# Altium PCB PCB1.PcbDoc
Units mm, origin at the board's own origin, x right, y up, seen from the top; angles counter-clockwise.
Board outline 37.35 x 18.93 mm, 2 copper layers (Top Layer, Bottom Layer); 29 components, 24 nets, 130 pads, 27 vias.
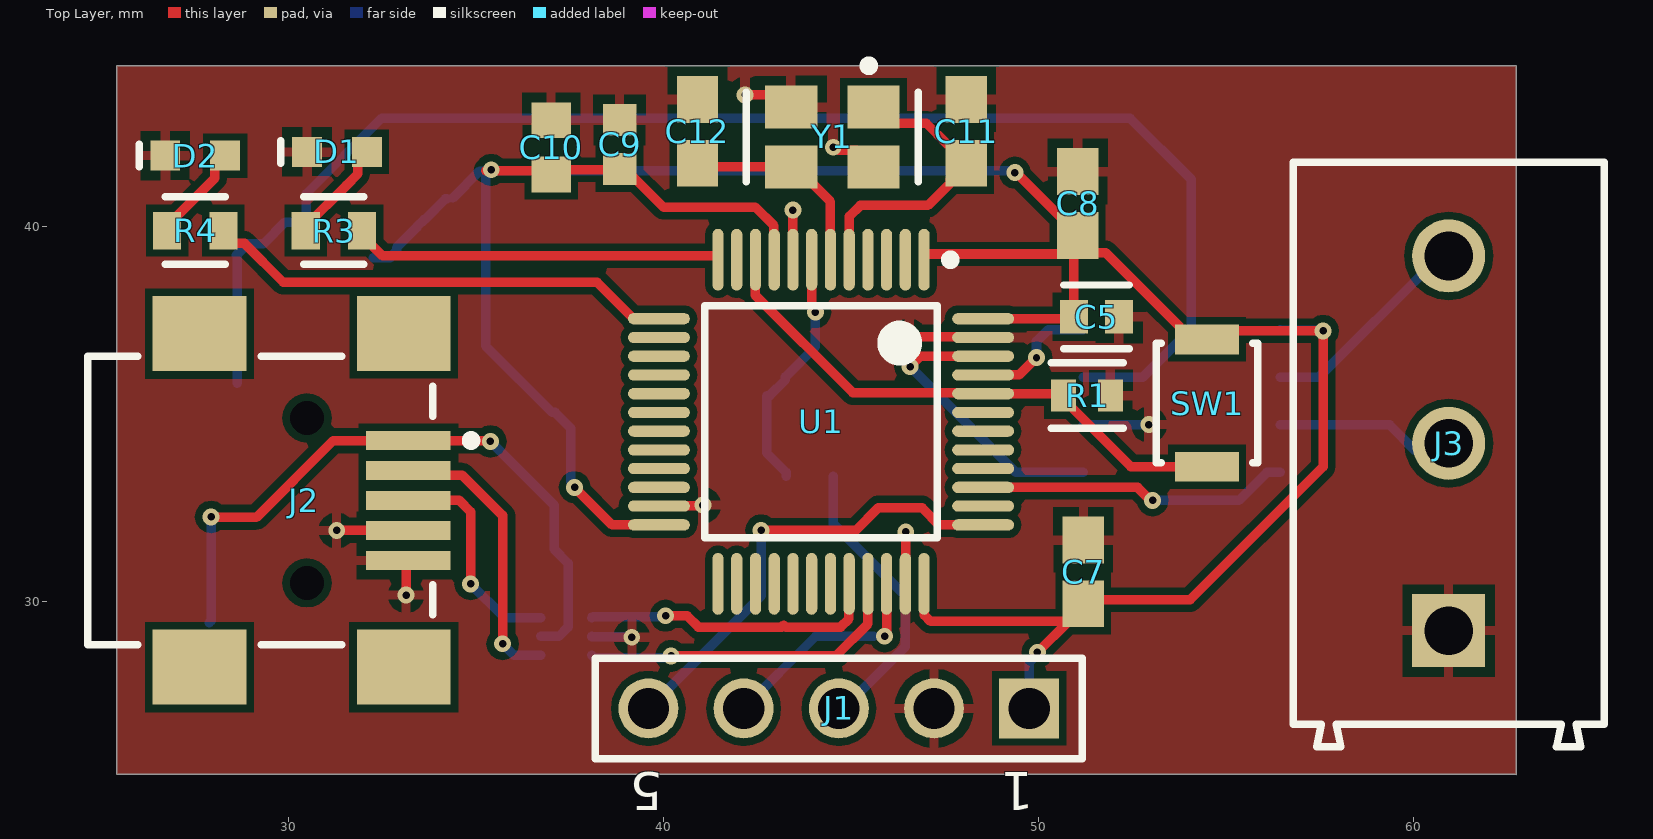
[diagram p0: Top Layer view]
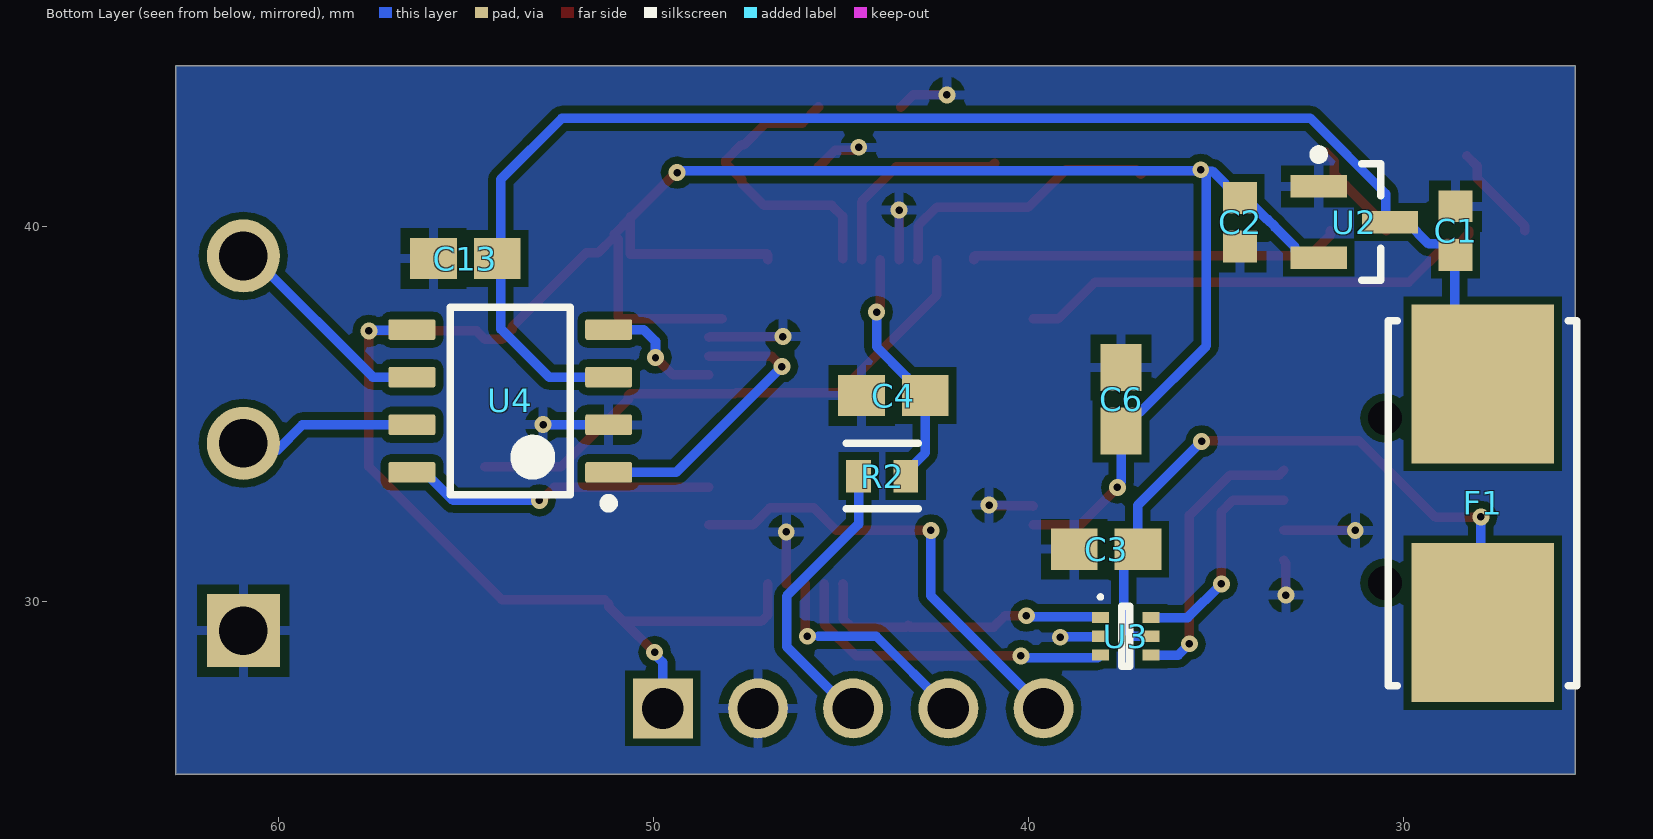
[diagram p1: Bottom Layer view, seen from below]
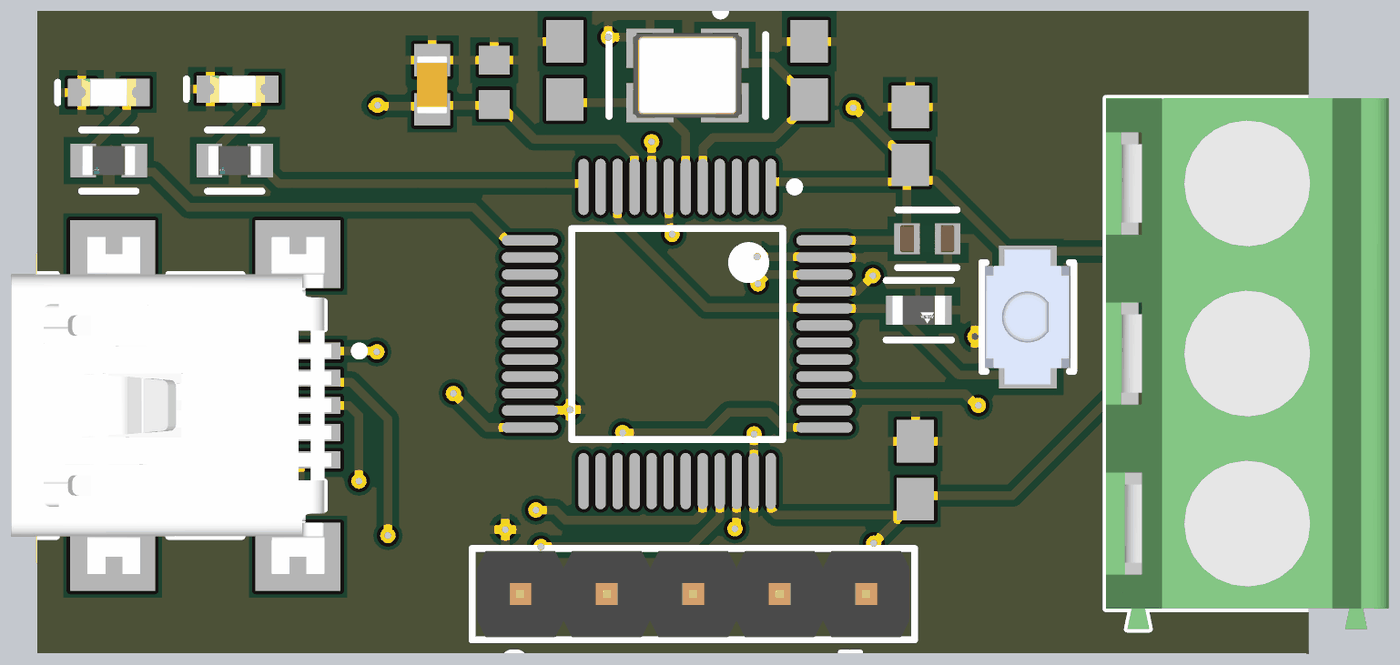
[diagram p2: 3D render of the assembled board from above, using the file's embedded part models]

## Layer stack, top to bottom
Top Solder: solder mask 0.0102, Solder Resist, Dk 3.5
Top Layer: signal copper 0.0356
Dielectric 1: dielectric 0.32, FR-4, Dk 4.8
Bottom Layer: signal copper 0.0356
Bottom Solder: solder mask 0.0102, Solder Resist, Dk 3.5

## Board outline
25.4,25.4 25.4,44.3 62.75,44.3 62.75,25.375 ccw(c62.725,25.375) 62.725,25.4

## Design rules (kind name [scope] priority, off if disabled: settings)
Clearance [All] p1: gap=0.2 ignorepadtopadclearanceinfootprint=FALSE
ComponentClearance [All] p1: gap=0.1 collisioncheckmode=3 verticalgap=0.1 showdistances=FALSE
PolygonConnect [All] p1: connectstyle=Relief reliefconductorwidth=0.254 reliefentries=4 polygonreliefangle="90 Angle" airgapwidth=0.254
RoutingVias [All] p1: holewidth=0.2 width=0.45 viastyle="Through Hole" minholewidth=0.2 minwidth=0.45 maxholewidth=0.2 maxwidth=0.45
SilkToSilkClearance [All] p1: silktosilkclearance=0.1
SolderMaskExpansion [All] p1: expansion=0.102 istentingtop=FALSE
Width [All] p1: maxlimit=0.254 minlimit=0.254 preferedwidth=0.254
28 further rules are at their usual default settings.

## Components (designator, comment, footprint, x,y, rotation, side; value= is the part's Value field where it differs from the comment)
C1 "1uF" CAPC1608X90X35LL15T15 28.6,39.9 r90 bottom
C2 "1uF" CAPC1608X90X35LL15T15 34.35,40.125 r270 bottom
C3 "100nF" CAPC1608X90X35ML15T15 37.925,31.4 r180 bottom
C4 "100nF" CAPC1608X90X35ML15T15 43.6,35.5 r0 bottom
C5 "4.7uF" FP-C0603-CG-MFG 51.55,37.6 r0 top
C6 "100nF" CAPC1608X90X35ML15T15 37.525,35.4 r90 bottom
C7 "100nF" CAPC1608X90X35ML15T15 51.2,30.795 r90 top
C8 "100nF" CAPC1608X90X35ML15T15 51.051,40.625 r90 top
C9 "1uF" CAPC1608X90X35LL15T15 38.825,42.2 r90 top
C10 "10nF" CAPC1608X90X35ML10T15 37,42.125 r90 top
C11 "10pF" CAPC1608X90X35ML15T15 48.075,42.55 r90 top
C12 "10pF" CAPC1608X90X35ML15T15 40.9,42.55 r90 top
C13 "100nF" CAPC1608X90X35ML15T15 55.025,39.156 r0 bottom
D1 "STATUS" 0603_A 31.283,42 r0 top
D2 "CAN1" 0603_A 27.5,41.9 r0 top
F1 "500mA" FP-0154-MFG 27.875,32.625 r270 bottom
J1 "SWD" 5PIN_HEADER 44.675,27.15 r180 top
J2 "10033526-N3212LF" FCI-10033526-N3212LF_V 30.4,32.7 r270 top
J3 "3PIN-Screw-Terminal" 3PIN-Screw-Terminal 60.95,34.225 r90 top
R1 "10K" FP-MCT0603-IPC_C 51.3,35.5 r0 top
R2 "10K" FP-MCT0603-IPC_C 43.9,33.35 r180 bottom
R3 "820R" FP-CRCW0603-e3-MFG 31.2,39.9 r180 top
R4 "330R" FP-CRCW0603-e3-MFG 27.5,39.9 r180 top
SW1 "B3U-1000P" FP-B3U-1000P-MFG 54.5,35.3 r270 top
U1 "STM32F302C8T6" STM-LQFP48_M 44.2,34.8 r270 top
U2 "MCP1700T-3302E/TT" SOT-23-TT3_N 31.3,40.13 r180 bottom
U3 "NUF2042XV6T1" ONSC-SOT-563-6-463A-01_V 37.4,29.075 r180 bottom
U4 "SN65HVD256DR" D0008A_L 53.825,35.355 r0 bottom
Y1 "TSX-3225 16.0000MF18X-AC0" FP-TSX-3225-MFG 44.5,42.4 r180 top

## Footprints (in the part's own frame and the unit in brackets; to place one, negate y for a bottom-side part, rotate by r counter-clockwise, add the part's x,y. Pads: shape width x height; smd on the part's side, far side on the other; paste and mask are expansions set on the pad)
3PIN-Screw-Terminal [mm] "5,00mm - modular - green - Horizontal entry with rising cage clamp -  10,0mm height - 03p"
  rect 1.95x1.95 hole 1.3: 1(-5,0)
  round 1.95 hole 1.3: 2(0,0) 3(5,0)
  silkscreen extent -8.1,-4.15 7.5,4.15, body extent -8.1,-4.15 7.5,4.15, height 10.05
5PIN_HEADER [mm] "Pin Header, pitch 2.54 mm, THT, Vertical, single row, 5p"
  rect 1.6x1.6 hole 1.1: 1(-5.08,0)
  round 1.6 hole 1.1: 2(-2.54,0) 3(0,0) 4(2.54,0) 5(5.08,0)
  silkscreen extent -6.5,-1.35 6.5,1.35, body extent -6.35,-1.27 6.35,1.27, height 8.57
0603_A [mm] "Chip LED, 2-Leads, Body 1.6x0.8mm, IPC Medium Density"
  rect 0.8x0.8 smd: 1(-0.8,0) 2(0.8,0)
  silkscreen extent -1.5,-0.3 -1.5,0.3, body extent -0.8,-0.4 0.8,0.4, height 0.7
CAPC1608X90X35LL15T15 [mm] "Chip Capacitor, 2-Leads, Body 1.60x0.81mm, IPC High Density"
  rect 0.85x0.9 smd: 1(-0.65,0) 2(0.65,0)
  body extent -0.88,-0.48 0.87,0.48, height 0.9
CAPC1608X90X35ML10T15 [mm] "Chip Capacitor, 2-Leads, Body 1.7x0.9mm, IPC Low Density"
  rect 0.95x1.05 smd: 1(-0.725,0) 2(0.725,0)
  body extent -0.85,-0.45 0.85,0.45, height 0.9
CAPC1608X90X35ML15T15 [mm] "Chip Capacitor, 2-Leads, Body 1.60x0.81mm, IPC Low Density"
  rect 1.25x1.1 smd: 1(-0.85,0) 2(0.85,0)
  body extent -0.88,-0.48 0.87,0.48, height 0.9
D0008A_L [mm] "SOIC, 8-Leads, Body 5x4mm, Pitch 1.27mm, IPC High Density"
  rrect18% 1.25x0.55 smd: 1(-2.625,1.905) 2(-2.625,0.635) 3(-2.625,-0.635) 4(-2.625,-1.905) 5(2.625,-1.905) 6(2.625,-0.635) 7(2.625,0.635) 8(2.625,1.905)
  silkscreen extent -2.75,-2.5 1.6,2.85, body extent -3,-2.45 3,2.45, height 1.63
FCI-10033526-N3212LF_V [mm] "SMD, 5-Leads, Body 9.2x7.7mm, Pitch 0.8mm"
  rect 0.5x2.25 smd: 1(-1.6,2.788) 2(-0.8,2.788) 3(0,2.788) 4(0.8,2.788) 5(1.6,2.788)
  rect 2x2.5 smd: 6(-4.45,2.663) 7(4.45,2.663) 8(-4.45,-2.787) 9(4.45,-2.787)
  round 0 hole 0.9 unplated: MH1(-2.2,0.083) MH2(2.2,0.083)
  silkscreen extent -3.85,-5.77 3.85,4.59, body extent -4.95,-5.77 4.95,3.63, height 4.02
FP-0154-MFG [mm]
  rect 4.24x3.81 smd paste+0 mask+0: 1(-3.185,0) 2(3.185,0)
  silkscreen extent -4.86,-2.51 4.86,2.51, body extent -4.86,-2.51 4.87,2.51, height 3.81
FP-B3U-1000P-MFG [mm]
  rect 0.8x1.7 smd paste+0 mask+0: 1(-1.7,0) 2(1.7,0)
  silkscreen extent -1.6,-1.35 1.6,1.35, body extent -2.2,-1.45 2.2,1.45, height 0.25
FP-C0603-CG-MFG [mm]
  rect 0.75x0.9 smd paste+0 mask+0: 1(-0.6,0) 2(0.6,0)
  silkscreen extent -0.87,-0.85 0.87,0.85, body extent -0.8,-0.4 0.8,0.4, height 0.9
FP-CRCW0603-e3-MFG [mm]
  rect 0.75x1 smd paste+0 mask+0: 1(-0.75,0) 2(0.75,0)
  silkscreen extent -0.8,-0.9 0.8,0.9, body extent -1.22,-0.6 1.22,0.6, height 0.25
FP-MCT0603-IPC_C [mm]
  rect 0.664x0.862 smd paste+0 mask+0: 1(-0.629,0) 2(0.629,0)
  silkscreen extent -0.96,-0.87 0.96,0.87, body extent -1.06,-0.58 1.06,0.58, height 0.25
FP-TSX-3225-MFG [mm]
  rect 1.4x1.15 smd paste+0 mask+0: 1(-1.1,-0.8) 2(1.1,-0.8) 3(1.1,0.8) 4(-1.1,0.8)
  silkscreen extent -2.3,-2.02 2.3,1.2, body extent -1.9,-1.48 1.9,1.48, height 0.25
ONSC-SOT-563-6-463A-01_V [mm] "SOT23, 6-Leads, Body 1.6x1.2mm, Pitch 0.5mm"
  rect 0.45x0.3 smd: 1(-0.675,0.5) 2(-0.675,0) 3(-0.675,-0.5) 4(0.675,-0.5) 5(0.675,0) 6(0.675,0.5)
  silkscreen extent -0.72,-0.8 0.1,1.1, body extent -0.6,-0.8 0.6,0.8, height 0.6
SOT-23-TT3_N [mm] "SOT23, 3-Leads, Body 2.9x1.3mm, Pitch 0.95mm, Lead Span 2.4mm, IPC Medium Density"
  rect 1.5x0.6 smd: 1(-0.95,0.95) 2(-0.95,-0.95) 3(0.95,0)
  silkscreen extent -1.07,-1.55 0.7,1.92, body extent -0.7,-1.52 0.7,1.53, height 1.12
STM-LQFP48_M [mm] "QFP, 48-Leads, Body 7x7mm, Pitch 0.5mm, IPC Low Density"
  oval 1.65x0.3 smd: 1(-4.325,2.75) 2(-4.325,2.25) 3(-4.325,1.75) 4(-4.325,1.25) 5(-4.325,0.75) 6(-4.325,0.25) 7(-4.325,-0.25) 8(-4.325,-0.75) 9(-4.325,-1.25) 10(-4.325,-1.75) 11(-4.325,-2.25) 12(-4.325,-2.75) 25(4.325,-2.75) 26(4.325,-2.25) 27(4.325,-1.75) 28(4.325,-1.25) 29(4.325,-0.75) 30(4.325,-0.25) 31(4.325,0.25) 32(4.325,0.75) 33(4.325,1.25) 34(4.325,1.75) 35(4.325,2.25) 36(4.325,2.75)
  oval 0.3x1.65 smd: 13(-2.75,-4.325) 14(-2.25,-4.325) 15(-1.75,-4.325) 16(-1.25,-4.325) 17(-0.75,-4.325) 18(-0.25,-4.325) 19(0.25,-4.325) 20(0.75,-4.325) 21(1.25,-4.325) 22(1.75,-4.325) 23(2.25,-4.325) 24(2.75,-4.325) 37(2.75,4.325) 38(2.25,4.325) 39(1.75,4.325) 40(1.25,4.325) 41(0.75,4.325) 42(0.25,4.325) 43(-0.25,4.325) 44(-0.75,4.325) 45(-1.25,4.325) 46(-1.75,4.325) 47(-2.25,4.325) 48(-2.75,4.325)
  silkscreen extent -4.45,-3.1 3.1,3.58, body extent -3.5,-3.5 3.5,3.5, height 1.6

## Part data
C1 C2 C9: library part CMP-2006-02298-2, Manufacturer=Kemet, Part Number=C0603C105K4RACTU
C3 C4 C6 C7 C8 C13: library part CMP-2006-04496-1, Manufacturer="AVX Interconnect / Elco", Part Number=0603YC104KAZ2A
C5: library part CMP-2006-02256-2, "CAP CER 4.7UF 6.3V X5R 0603", Manufacturer=Kemet, Manufacturer Part Number=C0603C475K9PACTU, Package=C0603-CG, Temperature="-55°C to +85°C", Temperature Characteristic=X5R, Temperature Coefficient=15%, Temperature Range High=+85°C, Temperature Range Low=-55°C, Tolerance=10%, Voltage Rating=6.3V, Automotive=No, Capacitance=4.7uF, Category=Cap, ComponentLink2Description=Datasheet, ComponentLink2URL=https://content.kemet.com/datasheets/KEM_C1006_X5R_SMD.pdf, Device Class L1="Passive Components", Device Class L2=Capacitors, Device Class L3="Ceramic Capacitors", Digikey Description="CAP CER 4.7UF 6.3V X5R 0603", Height=0.9mm, Lead Free=Yes, Material=Ceramic, Mouser Description="Multilayer Ceramic Capacitors MLCC - SMD/SMT 6.3volts 4.7uF X5R 10%", Octopart=https://octopart.com/c0603c475k9pactu-kemet-104242, RoHS=TRUE, Ipc Land Pattern Name=CAPC16080X80
C10: library part CMP-2100-03642-1, "Chip Capacitor, 10 nF, +/- 10%, 50 V, -55 to 125 degC, 0603 (1608 Metric), RoHS, Tape and Reel", Case Code (Metric)=1608, Case Code (Imperial)=0603, Dielectric=X7R, Dielectric Material=Ceramic, Manufacturer=Murata, Max Operating Temperature=125degC, Min Operating Temperature=-55degC, Package Description="2-Pin Surface Mount Device, Body 1.6 x 0.8 mm", Package Quantity=1, Tolerance=10%, Voltage=50V, Insulation Resistance=10GR, Capacitance=10nF, Case/Package=0603, Datasheet URL=http://search.murata.co.jp/Ceramy/image/img/A01X/G101/ENG/GRM188R71H103KA01-01.pdf, Datasheet Version=42401.0, Depth=0.8mm, Height=0.8mm, Lead Free=LeadFree, Length=1.6mm, Manufacturer URL=http://www.murata.com/, Material=Ceramic, Mount=SurfaceMount, Number of Pins=2, Package Reference=0603, Packaging=TapeandReel, REACH SVHC=Unknown, RoHSCompliant=True, Termination=SMD/SMT, Thickness=0.035inch, Voltage Rating=50V, Voltage Rating (DC)=50V, Width=0.031inch
C11 C12: library part CMP-2006-02082-1, Manufacturer="AVX Interconnect / Elco", Part Number=06035C100KAT2A
D1: library part CMP-1426-00001-1, "SMD mono-color Chip LED, WL-SMCW, Red", Color=Red, Manufacturer="Wuerth Elektronik", PartNumber=150060RS75000, ComponentLink1Description="Manufacturer URL", ComponentLink1URL=http://www.we-online.com, ComponentLink2Description=Datasheet, ComponentLink2URL=http://katalog.we-online.com/led/datasheet/150060RS75000.pdf, PackageReference=0603_A
D2: library part CMP-1426-00002-1, "SMD mono-color Chip LED, WL-SMCW, Green", Color=Green, Manufacturer="Wuerth Elektronik", PartNumber=150060GS75000, ComponentLink1Description="Manufacturer URL", ComponentLink1URL=http://www.we-online.com, ComponentLink2Description=Datasheet, ComponentLink2URL=http://katalog.we-online.com/led/datasheet/150060GS75000.pdf, PackageReference=0603_A
F1: library part CMP-08605-000021-1, "FUSE BOARD MNT 500MA 125VAC/VDC", Fuse Current=0.5A, Manufacturer=Littelfuse, Manufacturer Part Number=0154.500DRT, Max Fuse Ac Voltage=125V, Package=0154, Temperature="-55°C to +125°C", Temperature Range High=+125°C, Temperature Range Low=-55°C, Automotive=No, Category=Fuse, ComponentLink2Description=Datasheet, ComponentLink2URL=https://www.littelfuse.com/~/media/electronics/datasheets/fuses/littelfuse_fuse_154_154t_154l_154tl_datasheet.pdf.pdf, Device Class L1="Circuit Protection", Device Class L2=Fuses, Device Class L3=unset, Digikey Description="FUSE BOARD MNT 500MA 125VAC/VDC", Fuse Blow Speed=Slow, Fuse I2T=0.24A2Sec, Height=3.81mm, Lead Free=Yes, Max Fuse Dc Voltage=125V, Mouser Description="Surface Mount Fuses Fuseblck w/ fuse .5A OMNI BLOK 154T", Octopart=https://octopart.com/0154.500drt-littelfuse-565915, RoHS=TRUE
J1: library part 5PIN_HEADER
J2: library part CMP-1698-00001-3, "Mini USB B-Type, 5-Pin SMD, RoHS, Tape and Reel", Package Quantity=1, ComponentLink1Description="Manufacturer URL", ComponentLink1URL=http://portal.fciconnect.com/, ComponentLink2Description=Datasheet, ComponentLink2URL=http://portal.fciconnect.com/Comergent//fci/drawing/10033526.pdf, DatasheetVersion="Rev. N", Height="4 mm", Length="9.9 mm", Mount="Surface Mount", Mounting Technology="Surface Mount", PackageDescription="5-Pin Surface Mount Device, Body 9.2 x 7.7 mm, Pitch 0.8 mm", Packaging="Tape and Reel", PartNumber=10033526-N3212LF, Pins=5, RoHSCompliant=True
R1 R2: library part CMP-02407-000418-1, "RES SMD 100 OHM 1% 1/8W 0603", Case Code (Metric)=1608, Case Code (Imperial)=0603, Max Operating Temperature=125°C, Max Power Dissipation=125mW, Min Operating Temperature=-55°C, Package Quantity=1, Power Rating=100mW, Resistance=10kR, Temperature Coefficient=50ppm/°C, Tolerance=1%, Voltage Rating=75V, Case/Package=0603, Composition="Thin Film", Contact Plating=Tin, Depth=0.85mm, Height=0.022inch, Lead Free="Lead Free", Length=1.55mm, Military Standard=Not, Mount="Surface Mount", Number of Terminations=2, Packaging="Tape and Reel", Radiation Hardening=No, Voltage Rating (DC)=75V, Width=0.8mm
R3: library part CMP-2000-03596-2, "RES Thick Film, 820kΩ, 1%, 0.1W, 100ppm/°C, 0603", Case Code (Metric)=1608, Case Code (Imperial)=0603, Max Operating Temperature=155°C, Max Power Dissipation=100mW, Min Operating Temperature=-55°C, Package Quantity=10, Resistance=820kR, Temperature Coefficient=100ppm/°C, Tolerance=1%, Voltage Rating=75V, Case/Package=0603, Composition="Thick Film", Contact Plating=Tin, Depth=0.85mm, Features="Automotive AEC-Q200", Height=0.45mm, Lead Free="Lead Free", Length=1.55mm, Military Standard=Not, Number of Pins=2, Number of Terminations=2, Packaging="Tape and Reel", Power Rating=100mW, Radiation Hardening=No, Termination=SMD/SMT, Voltage Rating (DC)=75V, Weight=7.1E-05oz, Width=0.033inch
R4: library part CMP-1012-00454-3, "RES Thick Film, 330Ω, 1%, 0.1W, 100ppm/°C, 0603", Case Code (Metric)=1608, Case Code (Imperial)=0603, Max Operating Temperature=155°C, Max Power Dissipation=100mW, Min Operating Temperature=-55°C, Package Quantity=10, Temperature Coefficient=100ppm/°C, Tolerance=1%, Voltage Rating=75V, Case/Package=0603, Composition="Thick Film", Contact Plating=Tin, Depth=0.85mm, Features="Automotive AEC-Q200", Height=0.45mm, Lead Free="Lead Free", Length=1.55mm, Military Standard=Not, Mount="Surface Mount", Number of Terminations=2, Packaging="Tape and Reel", Power Rating=100mW, Radiation Hardening=No, Resistance=330R, Termination=SMD/SMT, Voltage Rating (DC)=75V, Weight=7.1E-05oz, Width=0.033inch
SW1: library part CMP-2100-03586-2, "SWITCH TACTILE SPST-NO 0.05A 12V", Contact Current Rating=50mA, Contact Resistance=100mR, Max Operating Temperature=70°C, Max Voltage Rating (DC)=12V, Min Operating Temperature=-25°C, Operating Force=1.5N, Package Quantity=1, Ratings="Dust Proof", Insulation Resistance=100MR, Actuator Length=0.4mm, Actuator Type=Standard, Contact Material=Silver, Current Rating=50mA, Depth=2.5mm, Electrical Life=200000Cycles, Height=1.2mm, Lead Free="Lead Free", Length=4mm, Max Current Rating=50mA, Mechanical Life=200000Cycles, Mount="Surface Mount", Orientation=Straight, Packaging="Tape and Reel", Switch Function=Off-Mom, Switch Travel=0.15mm, Termination=SMD/SMT, Throw Configuration=SPST, Voltage Rating (DC)=12V, Weight=0.000776oz, Width=3mm, Illumination Type=Non-Illuminated
U1: library part CMP-0537-00011-1, "ARM Cortex-M4 32-bit MCU, 64 KB Flash, 16 KB Internal RAM, 37 I/Os, 48-Pin LQFP, -40 to 85 degC, Tray", Operating Frequency(F) (Processor speed) (MHz)=72, Package Description="48-Pin Low Profile Quad Flat Package, Body 7 x 7 mm, Pitch 0.5 mm", Package Reference=LQFP48, Supply Voltage(Vcc) min (V)=2, I/Os (High Current)=37, ComponentLink1Description="Manufacturer URL", ComponentLink1URL=http://www.st.com/, ComponentLink2Description=Datasheet, ComponentLink2URL=http://www.st.com/st-web-ui/static/active/en/resource/technical/document/datasheet/DM00093333.pdf, Core="ARM Cortex-M4", D/A Converter=1, DatasheetVersion="Rev. 5", FLASH Size (Prog) (kB)=64, Mounting Technology="Surface Mount", Packing=Tray, Internal RAM Size (kB)=16
U2: library part CMP-0136-00791-1, "Low Quiescent Current LDO, 3-Pin SOT-23, Extended Temperature, Tape and Reel", Code_IPC=SOT23-3, DatasheetVersion="revB, Feb-2007", PackageDescription="3-Lead Plastic Small Outline Transistor (TT) [SOT-23]", PackageReference=SOT-23-TT3, PackageVersion="revBB, Aug-2009"
U3: library part CMP-1066-00026-1, "USB Upstream Terminator with ESD Protection, 6-Pin SOT-563, Pb-Free, Tape and Reel", Manufacturer="On Semiconductor", C Typ (pF)=42, ComponentLink1Description="Manufacturer URL", ComponentLink1URL=http://www.onsemi.com/, ComponentLink2Description=Datasheet, ComponentLink2URL=http://www.onsemi.cn/pub_link/Collateral/NUF2030XV6-D.PDF, ComponentLink3Description="Package Specification", ComponentLink3URL=http://www.onsemi.cn/pub_link/Collateral/463A-01.PDF, DatasheetVersion="Rev. 2", Mounting Technology="Surface Mount", Number of Lines=3, PackageDescription="6-Pin Small Outline Transistor, Body 1.6 x 1.2 mm, Pitch 0.5 mm", PackageReference=SOT-563-6-463A-01, PackageVersion="Rev. F, 04/2005", Packing="Tape and Reel", PartNumber=NUF2042XV6T1, RoHS=Pb-Free, V(BR) Typ (V)=6.8, VRWM Max (V)=5.25
U4: library part CMP-0315-00070-2, "CAN Transceiver with Fast Loop Times for Highly Loaded Networks, 85 mA, 5 V, -40 to 125 degC, 8-pin SOIC (D), Green (RoHS & no Sb/Br)", Bus Fault Voltage(V)="-27 to 40", Drivers Per Package=1, Manufacturer="Texas Instruments", Rating=Catalog, Supply Voltage(s)(V)=5, Code_JEDEC=MS-012AA, ComponentLink1Description=Datasheet, ComponentLink1URL=http://www.ti.com/general/docs/lit/getliterature.tsp?genericPartNumber=SN65HVD256&fileType=pdf, DatasheetVersion=SLLSEA2, Eco-Plan="Green (RoHS & no Sb/Br)", Features="Short prop delay, Fast loop times, RXD supply input", Mounting Technology="Surface Mount", PackageDescription="8-Pin Plastic Small Outline Integrated Circuit, 4.9 x 3.9 mm, Pitch 1.27 mm Pitch", PackageReference=D0008A, PackageVersion="revM, Jun-2011", PartNumber=SN65HVD256DR, Receivers Per Package=1, SubFamily=CAN, ICC(Max)(mA)=85, Isolated=No
Y1: library part CMP-36405-000005-1, "CRYSTAL 16.00 MHZ 9PF SMD", Frequency=16MHz, Load Capacitance=9pF, Manufacturer=EPSON, Package=TSX-3225, Temperature="-40°C to +85°C", Temperature Range High=+85°C, Temperature Range Low=-40°C, Tolerance=10ppm, Automotive=No, Category=Crys, ComponentLink2Description=Datasheet, ComponentLink2URL=https://support.epson.biz/td/api/doc_check.php?dl=brief_TSX-3225&lang=en, Device Class L1="Passive Components", Device Class L2="Crystals / Oscillators", Device Class L3=Crystals, Digikey Description="CRYSTAL 16.00 MHZ 9PF SMD", Esr=60Ω, Height=0.6mm, Lead Free=Yes, Manufacturer Part Number="TSX-3225 16.0000MF18X-AC0", Mouser Description="CRYSTAL 16.00 MHZ 9PF SMD", Octopart=https://octopart.com/tsx-3225+16.0000mf18x-ac0-epson-58756552, RoHS=TRUE, Series=TSX-3225, Stability=18ppm

## Via types
v1: diameter 0.45, hole 0.2, Top Layer to Bottom Layer, 27 vias

## Nets (pads, with @x,y where several pads share a name; then routed paths per layer and width w, separated by ;. In a path a pad name is that pad's centre, name@x,y a point inside that pad or via, vN(x,y) a via of type N, cw(c..) or ccw(c..) an arc to the next point about the centre after c; other vN are vias at no path point)
BOOT0: R1.1 SW1.2 U1.10 U1.44 | length 15
  Top Layer w0.254: U1.10 42.45,38.175 45.05,35.575 47.65,35.575 47.653,35.573 47.815,35.573 47.838,35.55 50.621,35.55 R1.1 50.671,35.401 52.471,33.6 SW1.2
CAN1_RX: U1.45 U4.4 | length 3.4
  Top Layer w0.254: U1.45 49.487,36.05 v1(49.95,36.512)
  Bottom Layer w0.254: v1(49.95,36.512) 49.95,36.944 50.266,37.26 U4.4
CAN1_STATUS_LED: R4.1 U1.13 | length 12.7
  Top Layer w0.254: R4.1 28.25,39.808 28.498,39.56 28.815,39.56 29.85,38.525 38.225,38.525 39.2,37.55 U1.13
CAN1_TX: U1.46 U4.1 | length 7.9
  Top Layer w0.254: v1(46.575,36.275) 46.85,36.55 U1.46
  Bottom Layer w0.254: v1(46.575,36.275) 49.4,33.45 U4.1
CAN_SILENT: U1.39 U4.8 | length 8.4
  Top Layer w0.254: U1.39 52.647,33.05 52.997,32.7 v1(53.05,32.7)
  Bottom Layer w0.254: v1(53.05,32.7) 55.35,32.7 56.1,33.45 U4.8
GND: C1.2 C2.2 C3.1 C4.2 C5.2 C6.2 C7.2 C8.2 C9.2 C10.2 C11.2 C12.2 C13.2 D1.1 D2.1 J1.2 J2.4 J2.5 J3.1 R1.2 U1.8 U1.23 U1.35 U1.47 U2.1 U3.2 U4.2 Y1.2 Y1.4 | length 14.2
  Top Layer w0.254: v1(31.275,31.9) J2.4 ; v1(33.125,30.175) 33.125,31.037 J2.5 ; U1.23 39.884,32.559 41.032,32.559 v1(41.048,32.575) ; v1(42.175,43.525) 43.075,43.525 Y1.2 ; U1.8 v1(43.45,40.45) ; v1(44.525,42.125) 44.578,42.125 44.655,42.048 45.152,42.048 Y1.4 ; U1.35 46.459,30.484 v1(46.459,31.859) ; v1(46.55,37.075) 46.552,37.073 48.502,37.073 U1.47
  Bottom Layer w0.254: U3.2 38.087,29.063 39.137,29.063 v1(39.15,29.05) ; U4.2 51.202,34.723 52.948,34.723 v1(52.95,34.725)
NetC4_1: C4.1 R2.2 U1.7 | length 6.6
  Top Layer w0.254: U1.7 43.95,37.883 44.051,37.782 v1(44.051,37.729)
  Bottom Layer w0.254: R2.2 43.271,33.449 42.75,33.97 C4.1 42.825,35.5 43.248,35.923 43.248,35.998 44.051,36.801 v1(44.051,37.729)
NetD1_2: D1.2 R3.2 | length 2.8
  Top Layer w0.254: R3.2 30.45,40.025 31.534,41.109 31.838,41.413 31.838,41.756 D1.2
NetD2_2: D2.2 R4.2 | length 2.6
  Top Layer w0.254: R4.2 26.75,40.025 28.027,41.302 28.027,41.627 D2.2
NetJ2_2: J2.2 U3.4 | length 7.6
  Top Layer w0.254: J2.2 33.311,33.377 34.623,33.377 35.7,32.3 v1(35.7,28.875)
  Bottom Layer w0.254: v1(35.7,28.875) 36,28.575 U3.4
NetJ2_3: J2.3 U3.6 | length 6
  Top Layer w0.254: J2.3 34.55,32.7 34.85,32.4 v1(34.85,30.475)
  Bottom Layer w0.254: v1(34.85,30.475) 35.75,29.575 U3.6
NetJ3_2: J3.2 U4.7 | length 4.4
  Bottom Layer w0.254: U4.7 59.371,34.72 60.066,34.025 J3.2@60.525,34.025
NetJ3_3: J3.3 U4.6 | length 5.3
  Bottom Layer w0.254: U4.6 57.491,35.99 J3.3@60.525,39.025
NRST: J1.3 R2.1 | length 7.8
  Bottom Layer w0.254: R2.1 44.529,32.071 46.45,30.15 46.45,28.8 44.8,27.15 J1.3
OSC_IN: C11.1 U1.5 Y1.1 | length 8
  Top Layer w0.254: U1.5@44.959,39.155 44.959,40.284 45.25,40.575 47.051,40.575 47.652,41.176 47.652,41.277 C11.1 48.075,41.775 47.652,42.198 47.577,42.198 47.008,42.767 46.033,42.767 Y1.1
OSC_OUT: C12.1 U1.6 Y1.3 | length 5.5
  Top Layer w0.254: C12.1 41,41.6 Y1.3 43.525,41.6 44.45,40.675 U1.6@44.45,39.125
STATUS_LED: R3.1 U1.12 | length 9.9
  Top Layer w0.254: R3.1 31.95,39.775 32.5,39.225 41.429,39.225 41.45,39.204 U1.12
SWCLK: J1.5 U1.37 | length 12.4
  Top Layer w0.254: v1(42.6,31.9) 45.125,31.9 45.725,32.5 46.9,32.5 47.35,32.05 U1.37
  Bottom Layer w0.254: J1.5 42.6,30.155 v1(42.6,31.9)
SWDIO: J1.4 U1.34 | length 5.7
  Top Layer w0.254: v1(45.898,29.075) 45.898,29.128 45.95,29.18 U1.34
  Bottom Layer w0.254: J1.4 44.06,29.075 45.6,29.075
USB_D+: U1.32 U3.1 | length 8.1
  Top Layer w0.254: v1(40.05,29.625) 40.625,29.625 40.927,29.323 43.148,29.323 43.2,29.375 43.253,29.323 44.723,29.323 44.941,29.541 44.941,30.466 U1.32
  Bottom Layer w0.254: U3.1 38.102,29.602 40.027,29.602 v1(40.05,29.625)
USB_D-: U1.33 U3.3 | length 8.9
  Top Layer w0.254: v1(40.2,28.55) 44.593,28.55 45.45,29.407 U1.33
  Bottom Layer w0.254: U3.3 38.152,28.498 40.148,28.498 v1(40.2,28.55)
V_BUS: C3.2 F1.2 J2.1 U3.5 | length 17.6
  Top Layer w0.254: v1@28.075,32.25 29.134,32.25 31.184,34.3 J2.1 35.35,34.3 v1(35.375,34.275)
  Bottom Layer w0.254: F1.2 27.925,29.49 v1(27.925,32.26) ; v1(35.375,34.275) 37.075,32.575 C3.2 37.45,31.025 37.45,29.32 37.205,29.075 U3.5
V_USB: C1.1 C13.1 F1.1 U2.3 U4.3 | length 38.8
  Bottom Layer w0.254: F1.1@28.625,35.825 28.625,39.225 C1.1 28.898,39.548 29.318,39.548 29.9,40.13 30.288,40.13 30.461,40.303 30.461,40.886 32.475,42.9 52.45,42.9 54.075,41.275 54.075,39.156 54.075,37.275 52.79,35.99 U4.3
VCC: C2.1 C5.1 C6.1 C7.1 C8.1 C9.1 C10.1 J1.1 SW1.1 U1.1 U1.9 U1.24 U1.36 U1.48 U2.2 U4.5 | length 80.5
  Top Layer w0.254: v1@35.25,41.5 35.4,41.5 36.9,41.5 C10.1 37.125,41.525 39,41.525 40,40.525 42.45,40.525 42.941,40.034 42.941,39.134 U1.9 ; v1(37.625,33.05) 38.625,32.05 U1.24 ; U1.36 46.959,30.466 46.959,29.638 47.122,29.475 C7.1@50.777,29.475 ; U1.1 46.95,39.256 46.971,39.277 50.628,39.277 C8.1@50.628,40.225 ; U1.48@48.175,37.55 50.9,37.55 C5.1 50.95,39.674 C8.1 ; v1(49.375,41.45) 49.403,41.45 50.579,40.273 50.628,40.273 C8.1@50.628,40.225 ; v1(49.975,28.65) 49.98,28.65 50.791,29.461 51.2,29.87 C7.1 51.305,30.05 54.05,30.05 57.6,33.6 v1(57.6,37.225) 54.725,37.225 SW1.1 54.05,37 53.777,37.273 53.777,37.331 51.794,39.313 51.474,39.313 51.051,39.736 C8.1 ; C8.1@50.628,40.225 51.051,39.802 C8.1
  Bottom Layer w0.254: U2.2 32.7,39.18 32.873,39.353 32.873,39.448 33.423,39.998 33.423,40.01 33.615,40.202 33.627,40.202 34.175,40.75 C2.1@34.225,40.75 ; C2.1@34.375,40.775 35.087,41.487 35.362,41.487 v1(35.4,41.525) ; v1(37.625,33.05) 37.625,33.103 37.525,33.203 37.525,34.625 37.102,35.048 37.027,35.048 35.25,36.825 35.25,41.5 49.325,41.5 v1(49.375,41.45) ; J1.1 49.755,28.377 49.975,28.597 v1(49.975,28.65) ; U4.5 56.468,37.243 57.582,37.243 v1(57.6,37.225)
pads on no net: J2.6 J2.7 J2.8 J2.9 J2.MH1 J2.MH2 U1.2 U1.3 U1.4 U1.11 U1.14 U1.15 U1.16 U1.17 U1.18 U1.19 U1.20 U1.21 U1.22 U1.25 U1.26 U1.27 U1.28 U1.29 U1.30 U1.31 U1.38 U1.40 U1.41 U1.42 U1.43

## Polygon pours and split planes (outlines as drawn)
GND on Top Layer "Top Layer-No Net" (solid, pour order 0): 25.4,25.4 25.4,44.3 62.75,44.3 62.75,25.375 ccw(c62.725,25.375) 62.725,25.4
GND on Bottom Layer "Top Layer-No Net1" (solid, pour order 1): 25.4,25.4 25.4,44.3 62.75,44.3 62.75,25.375 ccw(c62.725,25.375) 62.725,25.4

## Silkscreen, mask and mechanical layers (free items; w line width, h text height)
Board Outline:
  the board outline again, w0.127

## Text inside footprints (layer, text, board x,y; h text height)
J1: Top Overlay "1" at 49.875,25.45 h1.02 r180; Top Overlay "5" at 39.975,25.45 h1.02 r180